# Allegro board H6_REF_DDR4_V1_0.brd
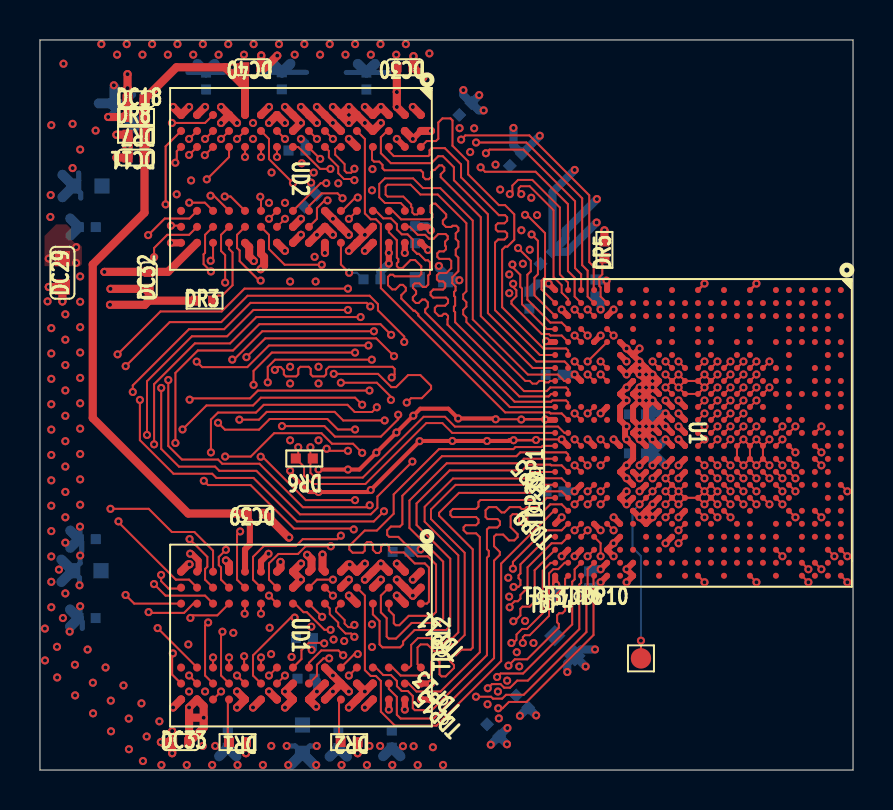
[diagram p0: board, top side]
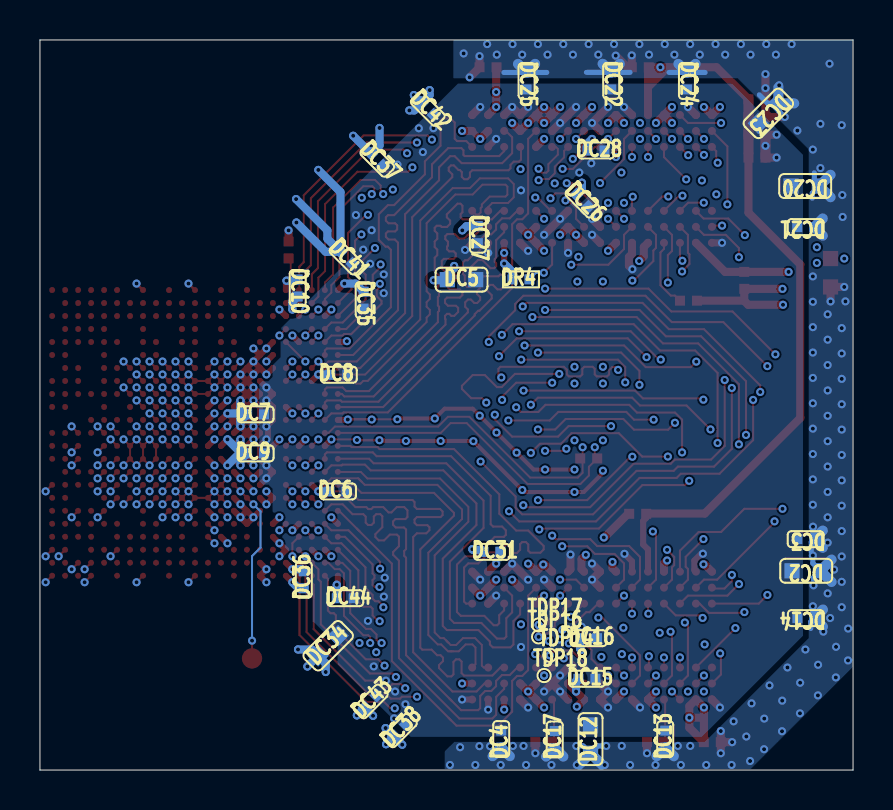
[diagram p1: board, bottom side, seen from below]

Outline 40.7 x 36.55 mm; copper layers: TOP, GND, POWER, BOTTOM. Coordinates in mm from the lower left corner of the outline.
Outline path: 0,36.55 0,0 40.7,0 40.7,36.55 0,36.55

## Design rules (mm)
net group POWER: nets SVREF VDD18-DRAM
net group DDR-ADD: nets SACT SALERT SBG0 SPAR SRST
net group DQS0-DQ0-200MIL: nets SDQ0 SDQ2 SDQ3 SDQ4 SDQ5 SDQ6 SDQ7
net group DQS1-DQ1-200MIL: nets SDQ8 SDQ9 SDQ10 SDQ11 SDQ12 SDQ14 SDQ15
net group DQS2-DQ2-200MIL: nets SDQ16 SDQ17 SDQ18 SDQ19 SDQ20 SDQ21 SDQ22 SDQ23 SDQM2 SDQS2N SDQS2P
net group DQS3-DQ3-200MIL: nets SDQ24 SDQ25 SDQ26 SDQ27 SDQ28 SDQ29 SDQ30 SDQ31 SDQM3 SDQS3N SDQS3P
net group ZQ: nets STEN1 STEN2 SZQ

## Placement (name value [footprint] x y rotation side)
DC2  NC-10uF  [C0603]  2.34 9.97 0 bottom
DC3  NC-1uF  [C0402]  2.37 11.56 0 bottom
DC4  NC-104  [C0402]  17.61 1.55 90 bottom
DC5  10uF  [C0603]  19.6 24.55 180 bottom
DC6  1uF  [C0402]  25.78 13.94 180 bottom
DC7  1uF  [C0402]  29.9 17.81 180 bottom
DC8  104  [C0402]  25.74 19.79 180 bottom
DC9  104  [C0402]  29.9 15.85 180 bottom
DC10  104  [C0402]  27.8 24.13 270 bottom
DC11  104  [C0402]  4.81 30.66 180 top
DC12  10uF  [C0603]  13.14 1.55 90 bottom
DC13  1uF  [C0402]  9.4 1.55 90 bottom
DC14  1uF  [C0402]  2.36 7.6 0 bottom
DC15  104  [C0402]  13.32 4.57 180 bottom
DC16  104  [C0402]  13.24 6.6 180 bottom
DC17  104  [C0402]  14.93 1.53 90 bottom
DC18  104  [C0402]  4.81 33.58 0 top
DC20  NC-10uF  [C0603]  2.4 29.24 0 bottom
DC21  NC-1uF  [C0402]  2.37 27.18 0 bottom
DC22  NC-104  [C0402]  12.1 34.5 270 bottom
DC23  10uF  [C0603]  4.24 32.87 315 bottom
DC24  1uF  [C0402]  8.31 34.49 270 bottom
DC25  1uF  [C0402]  16.34 34.49 270 bottom
DC26  104  [C0402]  13.55 28.5 225 bottom
DC27  104  [C0402]  18.78 26.8 270 bottom
DC28  104  [C0402]  12.87 31.01 180 bottom
DC29  10uF  [C0603]  1.13 24.89 90 top
DC30  1uF  [C0402]  18.27 35.18 180 top
DC31  1uF  [C0402]  18.07 10.92 180 bottom
DC32  104  [C0402]  5.44 24.51 90 top
DC33  104  [C0402]  7.04 1.4 0 top
DC34  NC/10uF  [C0603]  26.27 6.22 135 bottom
DC35  NC/1uF  [C0402]  24.49 23.52 270 bottom
DC36  104  [C0402]  27.49 9.53 90 bottom
DC37  NC/104  [C0402]  23.82 30.55 225 bottom
DC38  NC/104  [C0402]  22.68 1.99 135 bottom
DC39  104  [C0402]  10.78 12.83 180 top
DC40  104  [C0402]  10.65 35.18 180 top
DC41  NC/104  [C0402]  25.35 25.64 225 bottom
DC42  NC/104  [C0402]  21.29 33.09 225 bottom
DC43  NC/104  [C0402]  24.14 3.43 135 bottom
DC44  NC/104  [C0402]  25.41 8.6 180 bottom
DR1  100K  [R0402]  9.89 1.4 180 top
DR2  240-1%  [R0402]  15.48 1.4 180 top
DR3  100K  [R0402]  8.24 23.5 0 top
DR4  240-1%  [R0402]  16.62 24.56 180 bottom
DR5  240-1%  [R0402]  28.25 26.04 90 top
DR6  100R  [R0402]  13.23 15.6 180 top
DR7  2K-1%  [R0402]  4.81 31.8 180 top
DR8  2K-1%  [R0402]  4.81 32.69 0 top
NOREF  -  []  24.92 0 90 top
NOREF#2  -  []  0 0.49 0 top
TDP1  SDQS0P  [TP3_8X10]  24.78 14.92 90 top
TDP2  SDQ1  [TP4X10]  24.74 13.16 90 top
TDP3  SDQS1P  [TP3_8X10]  25.16 8.7 0 top
TDP4  SDQS1N  [TP3_8X10]  25.48 8.3 0 top
TDP5  SDQS0N  [TP3_8X10]  24.65 14.49 135 top
TDP6  SDQ13  [TP4X10]  26.99 8.7 0 top
TDP9  SDQM0  [TP4X10]  24.77 12.02 135 top
TDP10  SDQM1  [TP4X10]  27.71 8.7 0 top
TDP11  SDQS0P  [TP3_8X10]  20.31 6.43 135 top
TDP12  SDQS0N  [TP3_8X10]  20.11 5.94 90 top
TDP13  SDQ1  [TP4X10]  20.14 3.52 135 top
TDP14  SDQ13  [TP0_40]  15.18 5.75 180 bottom
TDP15  SDQM0  [TP4X10]  20.18 2.55 135 top
TDP16  SDQS1P  [TP0_40]  15.74 6.67 180 bottom
TDP17  SDQS1N  [TP0_40]  15.74 7.26 180 bottom
TDP18  SDQM1  [TP0_40]  15.46 4.73 180 bottom
TP1  CPUFB  [TP_SMD]  30.08 5.59 0 top
U1  H6-BGA-1219  [BGA451P65B1500_1500H118]  32.94 16.88 270 top
UD1  DDR4-FBGA96  [BGA96P80B900_1300H120]  13.06 6.73 270 top
UD2  DDR4-FBGA96  [BGA96P80B900_1300H120]  13.06 29.59 270 top

## Library data of the parts
DC2-DC18 DC20-DC35 DC37-DC44 = CAPACITOR_0
DC36 = CAPACITOR_0: signal model: CAPACITOR_0_C0402_104_104
DR1-DR6 = R
DR7 DR8 = ?_0
TDP1-TDP6 TDP9-TDP18 = TestPoint-on wire
TP1 = T_POINT_R
U1 = H6-BGA-1219
UD1 UD2 = DDR4-FBGA96

## Footprints (pads in the part's own frame, mm; a bottom-side part is the same pattern mirrored in y, then rotated)
BGA96P80B900_1300H120
  round 0.4 smd: A1(-3.2,6) A2(-2.4,6) A3(-1.6,6) A7(1.6,6) A8(2.4,6) A9(3.2,6) B1(-3.2,5.2) B2(-2.4,5.2) B3(-1.6,5.2) B7(1.6,5.2) B8(2.4,5.2) B9(3.2,5.2) C1(-3.2,4.4) C2(-2.4,4.4) C3(-1.6,4.4) C7(1.6,4.4) C8(2.4,4.4) C9(3.2,4.4) D1(-3.2,3.6) D2(-2.4,3.6) D3(-1.6,3.6) D7(1.6,3.6) D8(2.4,3.6) D9(3.2,3.6) E1(-3.2,2.8) E2(-2.4,2.8) E3(-1.6,2.8) E7(1.6,2.8) E8(2.4,2.8) E9(3.2,2.8) F1(-3.2,2) F2(-2.4,2) F3(-1.6,2) F7(1.6,2) F8(2.4,2) F9(3.2,2) G1(-3.2,1.2) G2(-2.4,1.2) G3(-1.6,1.2) G7(1.6,1.2) G8(2.4,1.2) G9(3.2,1.2) H1(-3.2,0.4) H2(-2.4,0.4) H3(-1.6,0.4) H7(1.6,0.4) H8(2.4,0.4) H9(3.2,0.4) J1(-3.2,-0.4) J2(-2.4,-0.4) J3(-1.6,-0.4) J7(1.6,-0.4) J8(2.4,-0.4) J9(3.2,-0.4) K1(-3.2,-1.2) K2(-2.4,-1.2) K3(-1.6,-1.2) K7(1.6,-1.2) K8(2.4,-1.2) K9(3.2,-1.2) L1(-3.2,-2) L2(-2.4,-2) L3(-1.6,-2) L7(1.6,-2) L8(2.4,-2) L9(3.2,-2) M1(-3.2,-2.8) M2(-2.4,-2.8) M3(-1.6,-2.8) M7(1.6,-2.8) M8(2.4,-2.8) M9(3.2,-2.8) N1(-3.2,-3.6) N2(-2.4,-3.6) N3(-1.6,-3.6) N7(1.6,-3.6) N8(2.4,-3.6) N9(3.2,-3.6) P1(-3.2,-4.4) P2(-2.4,-4.4) P3(-1.6,-4.4) P7(1.6,-4.4) P8(2.4,-4.4) P9(3.2,-4.4) R1(-3.2,-5.2) R2(-2.4,-5.2) R3(-1.6,-5.2) R7(1.6,-5.2) R8(2.4,-5.2) R9(3.2,-5.2) T1(-3.2,-6) T2(-2.4,-6) T3(-1.6,-6) T7(1.6,-6) T8(2.4,-6) T9(3.2,-6)
BGA451P65B1500_1500H118
  round 0.3 smd: A1(-7.15,7.15) A3(-5.85,7.15) A5(-4.55,7.15) A6(-3.9,7.15) A8(-2.6,7.15) A9(-1.95,7.15) A10(-1.3,7.15) A12(0,7.15) A13(0.65,7.15) A14(1.3,7.15) A16(2.6,7.15) A17(3.25,7.15) A18(3.9,7.15) A19(4.55,7.15) A20(5.2,7.15) A21(5.85,7.15) A22(6.5,7.15) A23(7.15,7.15) AA1(-7.15,-5.85) AA2(-6.5,-5.85) AA3(-5.85,-5.85) AA4(-5.2,-5.85) AA5(-4.55,-5.85) AA7(-3.25,-5.85) AA8(-2.6,-5.85) AA10(-1.3,-5.85) AA11(-0.65,-5.85) AA13(0.65,-5.85) AA14(1.3,-5.85) AA15(1.95,-5.85) AA16(2.6,-5.85) AA17(3.25,-5.85) AA19(4.55,-5.85) AA20(5.2,-5.85) AA21(5.85,-5.85) AA22(6.5,-5.85) AA23(7.15,-5.85) AB1(-7.15,-6.5) AB2(-6.5,-6.5) AB3(-5.85,-6.5) AB4(-5.2,-6.5) AB5(-4.55,-6.5) AB6(-3.9,-6.5) AB7(-3.25,-6.5) AB8(-2.6,-6.5) AB9(-1.95,-6.5) AB10(-1.3,-6.5) AB11(-0.65,-6.5) AB12(0,-6.5) AB13(0.65,-6.5) AB14(1.3,-6.5) AB15(1.95,-6.5) AB16(2.6,-6.5) AB17(3.25,-6.5) AB18(3.9,-6.5) AB19(4.55,-6.5) AB20(5.2,-6.5) AB21(5.85,-6.5) AB22(6.5,-6.5) AB23(7.15,-6.5) AC1(-7.15,-7.15) AC2(-6.5,-7.15) AC3(-5.85,-7.15) AC4(-5.2,-7.15) AC5(-4.55,-7.15) AC6(-3.9,-7.15) AC7(-3.25,-7.15) AC8(-2.6,-7.15) AC9(-1.95,-7.15) AC10(-1.3,-7.15) AC11(-0.65,-7.15) AC12(0,-7.15) AC13(0.65,-7.15) AC14(1.3,-7.15) AC15(1.95,-7.15) AC16(2.6,-7.15) AC17(3.25,-7.15) AC18(3.9,-7.15) AC19(4.55,-7.15) AC20(5.2,-7.15) AC21(5.85,-7.15) AC22(6.5,-7.15) AC23(7.15,-7.15) B1(-7.15,6.5) B2(-6.5,6.5) B3(-5.85,6.5) B4(-5.2,6.5) B5(-4.55,6.5) B6(-3.9,6.5) B7(-3.25,6.5) B8(-2.6,6.5) B9(-1.95,6.5) B10(-1.3,6.5) B12(0,6.5) B13(0.65,6.5) B14(1.3,6.5) B15(1.95,6.5) B16(2.6,6.5) B17(3.25,6.5) B18(3.9,6.5) B19(4.55,6.5) B20(5.2,6.5) B21(5.85,6.5) B22(6.5,6.5) B23(7.15,6.5) C1(-7.15,5.85) C2(-6.5,5.85) C3(-5.85,5.85) C4(-5.2,5.85) C5(-4.55,5.85) C7(-3.25,5.85) C8(-2.6,5.85) C9(-1.95,5.85) C12(0,5.85) C13(0.65,5.85) C14(1.3,5.85) C15(1.95,5.85) C16(2.6,5.85) C18(3.9,5.85) C19(4.55,5.85) C20(5.2,5.85) C22(6.5,5.85) C23(7.15,5.85) D1(-7.15,5.2) D2(-6.5,5.2) D3(-5.85,5.2) D4(-5.2,5.2) D5(-4.55,5.2) D9(-1.95,5.2) D11(-0.65,5.2) D12(0,5.2) D15(1.95,5.2) D16(2.6,5.2) D18(3.9,5.2) D19(4.55,5.2) D20(5.2,5.2) D21(5.85,5.2) D22(6.5,5.2) D23(7.15,5.2) E1(-7.15,4.55) E2(-6.5,4.55) E3(-5.85,4.55) E4(-5.2,4.55) E5(-4.55,4.55) E6(-3.9,4.55) E7(-3.25,4.55) E8(-2.6,4.55) E9(-1.95,4.55) E10(-1.3,4.55) E11(-0.65,4.55) E12(0,4.55) E13(0.65,4.55) E14(1.3,4.55) E15(1.95,4.55) E16(2.6,4.55) E17(3.25,4.55) E18(3.9,4.55) E19(4.55,4.55) E21(5.85,4.55) E22(6.5,4.55) F1(-7.15,3.9) F2(-6.5,3.9) F3(-5.85,3.9) F5(-4.55,3.9) F7(-3.25,3.9) F8(-2.6,3.9) F9(-1.95,3.9) F11(-0.65,3.9) F12(0,3.9) F13(0.65,3.9) F14(1.3,3.9) F15(1.95,3.9) F16(2.6,3.9) F17(3.25,3.9) F19(4.55,3.9) F20(5.2,3.9) F21(5.85,3.9) F22(6.5,3.9) F23(7.15,3.9) G2(-6.5,3.25) G3(-5.85,3.25) G7(-3.25,3.25) G8(-2.6,3.25) G9(-1.95,3.25) G10(-1.3,3.25) G11(-0.65,3.25) G12(0,3.25) G13(0.65,3.25) G14(1.3,3.25) G15(1.95,3.25) G16(2.6,3.25) G17(3.25,3.25) G20(5.2,3.25) G21(5.85,3.25) G22(6.5,3.25) H1(-7.15,2.6) H2(-6.5,2.6) H3(-5.85,2.6) H4(-5.2,2.6) H5(-4.55,2.6) H6(-3.9,2.6) H7(-3.25,2.6) H8(-2.6,2.6) H9(-1.95,2.6) H10(-1.3,2.6) H11(-0.65,2.6) H12(0,2.6) H13(0.65,2.6) H14(1.3,2.6) H15(1.95,2.6) H16(2.6,2.6) H17(3.25,2.6) H18(3.9,2.6) H19(4.55,2.6) H20(5.2,2.6) H21(5.85,2.6) H22(6.5,2.6) H23(7.15,2.6) J2(-6.5,1.95) J3(-5.85,1.95) J5(-4.55,1.95) J6(-3.9,1.95) J7(-3.25,1.95) J8(-2.6,1.95) J9(-1.95,1.95) J10(-1.3,1.95) J11(-0.65,1.95) J12(0,1.95) J13(0.65,1.95) J14(1.3,1.95) J15(1.95,1.95) J16(2.6,1.95) J17(3.25,1.95) J19(4.55,1.95) J20(5.2,1.95) J21(5.85,1.95) J22(6.5,1.95) K1(-7.15,1.3) K2(-6.5,1.3) K3(-5.85,1.3) K7(-3.25,1.3) K8(-2.6,1.3) K9(-1.95,1.3) K10(-1.3,1.3) K11(-0.65,1.3) K12(0,1.3) K13(0.65,1.3) K14(1.3,1.3) K15(1.95,1.3) K16(2.6,1.3) K17(3.25,1.3) K18(3.9,1.3) K20(5.2,1.3) K21(5.85,1.3) K22(6.5,1.3) K23(7.15,1.3) L2(-6.5,0.65) L3(-5.85,0.65) L4(-5.2,0.65) L5(-4.55,0.65) L6(-3.9,0.65) L7(-3.25,0.65) L8(-2.6,0.65) L9(-1.95,0.65) L10(-1.3,0.65) L11(-0.65,0.65) L12(0,0.65) L13(0.65,0.65) L14(1.3,0.65) L15(1.95,0.65) L16(2.6,0.65) L17(3.25,0.65) L18(3.9,0.65) L19(4.55,0.65) L20(5.2,0.65) L21(5.85,0.65) L22(6.5,0.65) M1(-7.15,0) M2(-6.5,0) M3(-5.85,0) M4(-5.2,0) M5(-4.55,0) M6(-3.9,0) M7(-3.25,0) M8(-2.6,0) M9(-1.95,0) M10(-1.3,0) M11(-0.65,0) M12(0,0) M13(0.65,0) M14(1.3,0) M15(1.95,0) M16(2.6,0) M17(3.25,0) M18(3.9,0) M19(4.55,0) M21(5.85,0) M22(6.5,0) M23(7.15,0) N2(-6.5,-0.65) N3(-5.85,-0.65) N7(-3.25,-0.65) N8(-2.6,-0.65) N9(-1.95,-0.65) N10(-1.3,-0.65) N11(-0.65,-0.65) N12(0,-0.65) N13(0.65,-0.65) N14(1.3,-0.65) N15(1.95,-0.65) N16(2.6,-0.65) N17(3.25,-0.65) N18(3.9,-0.65) N19(4.55,-0.65) N20(5.2,-0.65) N22(6.5,-0.65) N23(7.15,-0.65) P1(-7.15,-1.3) P2(-6.5,-1.3) P3(-5.85,-1.3) P4(-5.2,-1.3) P5(-4.55,-1.3) P6(-3.9,-1.3) P7(-3.25,-1.3) P8(-2.6,-1.3) P9(-1.95,-1.3) P10(-1.3,-1.3) P11(-0.65,-1.3) P12(0,-1.3) P13(0.65,-1.3) P14(1.3,-1.3) P15(1.95,-1.3) P16(2.6,-1.3) P17(3.25,-1.3) P18(3.9,-1.3) P19(4.55,-1.3) P20(5.2,-1.3) P21(5.85,-1.3) P22(6.5,-1.3) R2(-6.5,-1.95) R3(-5.85,-1.95) R5(-4.55,-1.95) R6(-3.9,-1.95) R7(-3.25,-1.95) R8(-2.6,-1.95) R9(-1.95,-1.95) R10(-1.3,-1.95) R11(-0.65,-1.95) R12(0,-1.95) R13(0.65,-1.95) R14(1.3,-1.95) R15(1.95,-1.95) R16(2.6,-1.95) R17(3.25,-1.95) R18(3.9,-1.95) R19(4.55,-1.95) R20(5.2,-1.95) R21(5.85,-1.95) R22(6.5,-1.95) R23(7.15,-1.95) T1(-7.15,-2.6) T2(-6.5,-2.6) T3(-5.85,-2.6) T7(-3.25,-2.6) T8(-2.6,-2.6) T9(-1.95,-2.6) T10(-1.3,-2.6) T11(-0.65,-2.6) T12(0,-2.6) T13(0.65,-2.6) T14(1.3,-2.6) T15(1.95,-2.6) T16(2.6,-2.6) T17(3.25,-2.6) T18(3.9,-2.6) T19(4.55,-2.6) T20(5.2,-2.6) T21(5.85,-2.6) T22(6.5,-2.6) U2(-6.5,-3.25) U3(-5.85,-3.25) U4(-5.2,-3.25) U5(-4.55,-3.25) U6(-3.9,-3.25) U7(-3.25,-3.25) U8(-2.6,-3.25) U9(-1.95,-3.25) U10(-1.3,-3.25) U11(-0.65,-3.25) U12(0,-3.25) U13(0.65,-3.25) U14(1.3,-3.25) U15(1.95,-3.25) U16(2.6,-3.25) U17(3.25,-3.25) U18(3.9,-3.25) U19(4.55,-3.25) U21(5.85,-3.25) U22(6.5,-3.25) U23(7.15,-3.25) V1(-7.15,-3.9) V2(-6.5,-3.9) V3(-5.85,-3.9) V5(-4.55,-3.9) V6(-3.9,-3.9) V7(-3.25,-3.9) V9(-1.95,-3.9) V10(-1.3,-3.9) V11(-0.65,-3.9) V13(0.65,-3.9) V15(1.95,-3.9) V17(3.25,-3.9) V19(4.55,-3.9) V20(5.2,-3.9) V21(5.85,-3.9) V22(6.5,-3.9) V23(7.15,-3.9) W1(-7.15,-4.55) W2(-6.5,-4.55) W3(-5.85,-4.55) W4(-5.2,-4.55) W5(-4.55,-4.55) W7(-3.25,-4.55) W8(-2.6,-4.55) W10(-1.3,-4.55) W11(-0.65,-4.55) W13(0.65,-4.55) W14(1.3,-4.55) W16(2.6,-4.55) W17(3.25,-4.55) W19(4.55,-4.55) W21(5.85,-4.55) W22(6.5,-4.55) W23(7.15,-4.55) Y1(-7.15,-5.2) Y2(-6.5,-5.2) Y3(-5.85,-5.2) Y5(-4.55,-5.2) Y7(-3.25,-5.2) Y8(-2.6,-5.2) Y10(-1.3,-5.2) Y11(-0.65,-5.2) Y13(0.65,-5.2) Y14(1.3,-5.2) Y16(2.6,-5.2) Y17(3.25,-5.2) Y19(4.55,-5.2) Y20(5.2,-5.2) Y21(5.85,-5.2) Y22(6.5,-5.2) Y23(7.15,-5.2)
C0402
  rect 0.5x0.5 smd: 1(-0.425,0) 2(0.425,0)
C0603
  rect 0.76x0.76 smd: 1(-0.71,0) 2(0.71,0)
R0402
  rect 0.5x0.5 smd: 1(-0.425,0) 2(0.425,0)
TP0_40
  round 0.406 smd: 1(0,0)
TP3_8X10
  rect 0.097x0.254 smd: 1(0,0)
TP4X10
  rect 0.102x0.254 smd: 1(0,0)
TP_SMD
  round 1.016 smd: 1(0,0)

## Nets
GND: DC2.1 DC3.1 DC4.1 DC5.1 DC6.1 DC7.1 DC8.1 DC9.1 DC10.1 DC12.1 DC13.1 DC14.1 DC15.1 DC16.1 DC17.1 DC18.1 DC20.1 DC21.1 DC22.1 DC23.1 DC24.1 DC25.1 DC26.1 DC27.1 DC28.1 DC29.1 DC30.1 DC31.1 DC32.1 DC33.1 DC34.1 DC35.1 DC36.1 DC37.1 DC38.1 DC39.1 DC40.1 DC41.1 DC42.1 DC43.1 DC44.1 DR1.1 DR2.1 DR3.1 DR4.1 DR5.2 DR8.1 U1.A16(GND2) U1.A21(GND3) U1.A23(GND4) U1.AA8(GND140) U1.AA16(GND141) U1.AA21(GND142) U1.AB3(GND143) U1.AB13(GND144) U1.AB21(GND145) U1.AC1(GND146) U1.AC5(GND147) U1.AC11(GND148) U1.AC19(GND149) U1.AC23(GND150) U1.C12(GND6) U1.C13(GND7) U1.C14(GND8) U1.C18(GND9) U1.C22(GND10) U1.D23(GND11) U1.E13(GND17) U1.E15(GND18) U1.E16(GND19) U1.E18(GND20) U1.F12(GND21) U1.F13(GND22) U1.F14(GND23) U1.F15(GND24) U1.F16(GND25) U1.F17(GND26) U1.F21(GND27) U1.G7(GND1) U1.G9(GND28) U1.G15(GND29) U1.H1(GND30) U1.H7(GND31) U1.H8(GND32) U1.H9(GND33) U1.H10(GND34) U1.H12(GND35) U1.H15(GND36) U1.H16(GND37) U1.H23(GND38) U1.J7(GND39) U1.J8(GND40) U1.J9(GND41) U1.J10(GND42) U1.J11(GND43) U1.J12(GND44) U1.J15(GND45) U1.J16(GND46) U1.J17(GND47) U1.K7(GND48) U1.K8(GND49) U1.K9(GND50) U1.K10(GND51) U1.K11(GND52) U1.K12(GND53) U1.K13(GND54) U1.K14(GND55) U1.K15(GND56) U1.K16(GND57) U1.K17(GND58) U1.L7(GND59) U1.L9(GND60) U1.L10(GND61) U1.L11(GND62) U1.L12(GND63) U1.L13(GND64) U1.L14(GND65) U1.L15(GND66) U1.L18(GND67) U1.M1(GND68) U1.M7(GND69) U1.M10(GND70) U1.M11(GND71) U1.M12(GND72) U1.M13(GND73) U1.M14(GND74) U1.M15(GND75) U1.M18(GND76) U1.M23(GND77) U1.N7(GND78) U1.N10(GND79) U1.N11(GND80) U1.N12(GND81) U1.N13(GND82) U1.N14(GND83) U1.N15(GND84) U1.N18(GND85) U1.P7(GND86) U1.P10(GND87) U1.P11(GND88) U1.P12(GND89) U1.P13(GND90) U1.P14(GND91) U1.P20(GND92) U1.R8(GND93) U1.R9(GND94) U1.R10(GND95) U1.R11(GND96) U1.R12(GND97) U1.R13(GND98) U1.R14(GND99) U1.R15(GND100) U1.R17(GND101) U1.R18(GND102) U1.T7(GND103) U1.T8(GND104) U1.T9(GND105) U1.T10(GND106) U1.T11(GND107) U1.T12(GND108) U1.T13(GND109) U1.T14(GND110) U1.T15(GND111) U1.T16(GND112) U1.T18(GND113) U1.T19(GND114) U1.U6(GND115) U1.U7(GND116) U1.U9(GND117) U1.U10(GND118) U1.U11(GND119) U1.U12(GND120) U1.U15(GND121) U1.U17(GND122) U1.U18(GND123) U1.U22(GND124) U1.U23(GND125) U1.V5(GND126) U1.V7(GND127) U1.V13(GND128) U1.V17(GND129) U1.V19(GND130) U1.V20(GND131) U1.W1(GND132) U1.W3(GND133) U1.W10(GND134) U1.W21(GND135) U1.W23(GND136) U1.Y5(GND137) U1.Y13(GND138) U1.Y19(GND139) UD1.A2(VSSQ1) UD1.A8(VSSQ2) UD1.B2(VSS1) UD1.C9(VSSQ3) UD1.D2(VSSQ4) UD1.D8(VSSQ5) UD1.E1(VSS2) UD1.E3(VSSQ6) UD1.E8(VSSQ7) UD1.E9(VSS3) UD1.F1(VSSQ8) UD1.G8(VSS4) UD1.H1(VSSQ9) UD1.H9(VSSQ10) UD1.K1(VSS5) UD1.K9(VSS6) UD1.M9(VSS7) UD1.N1(VSS8) UD1.T1(VSS9) UD2.A2(VSSQ1) UD2.A8(VSSQ2) UD2.B2(VSS1) UD2.C9(VSSQ3) UD2.D2(VSSQ4) UD2.D8(VSSQ5) UD2.E1(VSS2) UD2.E3(VSSQ6) UD2.E8(VSSQ7) UD2.E9(VSS3) UD2.F1(VSSQ8) UD2.G8(VSS4) UD2.H1(VSSQ9) UD2.H9(VSSQ10) UD2.K1(VSS5) UD2.K9(VSS6) UD2.M9(VSS7) UD2.N1(VSS8) UD2.T1(VSS9)
VCC25-DRAM: DC29.2 DC30.2 DC31.2 DC32.2 DC33.2 UD1.B1(VPP1) UD1.R9(VPP2) UD2.B1(VPP1) UD2.R9(VPP2)
VCC-DRAM: DC2.2 DC3.2 DC4.2 DC5.2 DC6.2 DC7.2 DC8.2 DC9.2 DC11.2 DC12.2 DC13.2 DC14.2 DC15.2 DC16.2 DC17.2 DC20.2 DC21.2 DC22.2 DC23.2 DC24.2 DC25.2 DC26.2 DC27.2 DC28.2 DC34.2 DC35.2 DC37.2 DC38.2 DC41.2 DC42.2 DC43.2 DC44.2 DR7.2 U1.U8(VCC-DRAM1) U1.U13(VCC-DRAM2) U1.U14(VCC-DRAM3) U1.U16(VCC-DRAM4) U1.V9(VCC-DRAM5) U1.V10(VCC-DRAM6) U1.V11(VCC-DRAM7) U1.V15(VCC-DRAM8) UD1.A1(VDDQ1) UD1.A9(VDDQ2) UD1.B3(VDD1) UD1.B9(VDD2) UD1.C1(VDDQ3) UD1.D1(VDD3) UD1.D9(VDDQ4) UD1.F2(VDDQ5) UD1.F8(VDDQ6) UD1.G1(VDDQ7) UD1.G7(VDD4) UD1.G9(VDDQ8) UD1.J1(VDD5) UD1.J2(VDDQ9) UD1.J8(VDDQ10) UD1.J9(VDD6) UD1.L1(VDD7) UD1.L9(VDD8) UD1.R1(VDD9) UD1.T9(VDD10) UD2.A1(VDDQ1) UD2.A9(VDDQ2) UD2.B3(VDD1) UD2.B9(VDD2) UD2.C1(VDDQ3) UD2.D1(VDD3) UD2.D9(VDDQ4) UD2.F2(VDDQ5) UD2.F8(VDDQ6) UD2.G1(VDDQ7) UD2.G7(VDD4) UD2.G9(VDDQ8) UD2.J1(VDD5) UD2.J2(VDDQ9) UD2.J8(VDDQ10) UD2.J9(VDD6) UD2.L1(VDD7) UD2.L9(VDD8) UD2.R1(VDD9) UD2.T9(VDD10)
VCC-IO: U1.G8(VCC-IO)
VDD18-DRAM: DC36.2 U1.W22(VDD18-DRAM)
VDD-CPU: U1.L16(VDD-CPU1) U1.L17(VDD-CPU2) U1.M16(VDD-CPU3) U1.M17(VDD-CPU4) U1.N16(VDD-CPU5) U1.N17(VDD-CPU6) U1.P15(VDD-CPU7) U1.P16(VDD-CPU8) U1.P17(VDD-CPU9)
VDD-CPUFB: TP1.1(TP) U1.R16(VDD-CPUFB1) U1.T17(VDD-CPUFB2)
VDD-CPUS: U1.K18(VDD-CPUS)
VDD-EFUSE: U1.G11(VDD-EFUSE)
VDD-GPU: U1.L8(VDD-GPU1) U1.M8(VDD-GPU2) U1.M9(VDD-GPU3) U1.N8(VDD-GPU4) U1.N9(VDD-GPU5) U1.P8(VDD-GPU6) U1.P9(VDD-GPU7)
VDD-GPUFB: U1.R7(VDD-GPUFB)
VDD-SYS: U1.G13(VDD-SYS1) U1.G14(VDD-SYS2) U1.H13(VDD-SYS3) U1.H14(VDD-SYS4) U1.J13(VDD-SYS5) U1.J14(VDD-SYS6)
SA0: U1.AA15(SA0) UD1.P3(A0) UD2.P3(A0)
SA1: U1.AA17(SA1) UD1.P7(A1) UD2.P7(A1)
SA2: U1.AA19(SA2) UD1.R3(A2) UD2.R3(A2)
SA3: U1.Y20(SA3) UD1.N7(A3) UD2.N7(A3)
SA4: U1.Y16(SA4) UD1.N3(A4) UD2.N3(A4)
SA5: U1.Y10(SA5) UD1.P8(A5) UD2.P8(A5)
SA6: U1.Y8(SA6) UD1.P2(A6) UD2.P2(A6)
SA7: U1.AA5(SA7) UD1.R8(A7) UD2.R8(A7)
SA8: U1.AA7(SA8) UD1.R2(A8) UD2.R2(A8)
SA9: U1.Y3(SA9) UD1.R7(A9) UD2.R7(A9)
SA10: U1.Y17(SA10) UD1.M3(A10) UD2.M3(A10)
SA11: U1.W17(SA11) UD1.T2(A11) UD2.T2(A11)
SA12: U1.W16(SA12) UD1.M7(A12) UD2.M7(A12)
SA13: U1.W5(SA13) UD1.T8(A13) UD2.T8(A13)
SACT: U1.AA11(SACT) UD1.L3(ACT) UD2.L3(ACT)
SALERT: U1.Y21(SALERT) UD1.P9(ALERT) UD2.P9(ALERT)
SBA0: U1.W7(SBA0) UD1.N2(BA0) UD2.N2(BA0)
SBA1: U1.AA20(SBA1) UD1.N8(BA1) UD2.N8(BA1)
SBG0: U1.W8(SBG0) UD1.M2(BG0) UD2.M2(BG0)
SCAS: U1.W19(SCAS/SA15) UD1.M8(A15/CAS) UD2.M8(A15/CAS)
SCKE0: U1.W14(SCKE0) UD1.K2(CKE0) UD2.K2(CKE0)
SCKN: DR6.1 U1.AB12(SCKN) UD1.K8(CK#) UD2.K8(CK#)
SCKP: DR6.2 U1.AC12(SCKP) UD1.K7(CK) UD2.K7(CK)
SCS0: U1.W13(SCS0) UD1.L7(CS0) UD2.L7(CS0)
SDQ0: U1.AB18(SDQ0) UD1.C8(DQ13)
SDQ1: TDP2.1(TP) TDP13.1(TP) U1.AC17(SDQ1) UD1.D7(DQ15)
SDQ2: U1.AB17(SDQ2) UD1.B8(DQ9)
SDQ3: U1.AC16(SDQ3) UD1.C7(DQ11)
SDQ4: U1.AB15(SDQ4) UD1.D3(DQ14)
SDQ5: U1.AB14(SDQ5) UD1.C3(DQ10)
SDQ6: U1.AC14(SDQ6) UD1.C2(DQ12)
SDQ7: U1.AC13(SDQ7) UD1.A3(DQ8)
SDQ8: U1.AB19(SDQ8) UD1.H2(DQ4)
SDQ9: U1.AC20(SDQ9) UD1.G2(DQ0)
SDQ10: U1.AC21(SDQ10) UD1.J3(DQ6)
SDQ11: U1.AB20(SDQ11) UD1.H3(DQ2)
SDQ12: U1.AB23(SDQ12) UD1.J7(DQ7)
SDQ13: TDP6.1(TP) TDP14.1(TP) U1.AA23(SDQ13) UD1.H7(DQ3)
SDQ14: U1.AA22(SDQ14) UD1.F7(DQ1)
SDQ15: U1.Y22(SDQ15) UD1.H8(DQ5)
SDQ16: U1.AC6(SDQ16) UD2.C3(DQ10)
SDQ17: U1.AB6(SDQ17) UD2.A3(DQ8)
SDQ18: U1.AC7(SDQ18) UD2.D3(DQ14)
SDQ19: U1.AB7(SDQ19) UD2.C2(DQ12)
SDQ20: U1.AC9(SDQ20) UD2.B8(DQ9)
SDQ21: U1.AB9(SDQ21) UD2.C7(DQ11)
SDQ22: U1.AC10(SDQ22) UD2.C8(DQ13)
SDQ23: U1.AB10(SDQ23) UD2.D7(DQ15)
SDQ24: U1.Y1(SDQ24) UD2.H2(DQ4)
SDQ25: U1.Y2(SDQ25) UD2.G2(DQ0)
SDQ26: U1.AA1(SDQ26) UD2.H3(DQ2)
SDQ27: U1.AA2(SDQ27) UD2.J3(DQ6)
SDQ28: U1.AC2(SDQ28) UD2.J7(DQ7)
SDQ29: U1.AC3(SDQ29) UD2.F7(DQ1)
SDQ30: U1.AC4(SDQ30) UD2.H8(DQ5)
SDQ31: U1.AB4(SDQ31) UD2.H7(DQ3)
SDQM0: TDP9.1(TP) TDP15.1(TP) U1.AC18(SDQM0) UD1.E2(DM1)
SDQM1: TDP10.1(TP) TDP18.1(TP) U1.Y23(SDQM1) UD1.E7(DM0)
SDQM2: U1.AB11(SDQM2) UD2.E2(DM1)
SDQM3: U1.AB5(SDQM3) UD2.E7(DM0)
SDQS0N: TDP5.1(TP) TDP12.1(TP) U1.AB16(SDQS0N) UD1.A7(DQS1#)
SDQS0P: TDP1.1(TP) TDP11.1(TP) U1.AC15(SDQS0P) UD1.B7(DQS1)
SDQS1N: TDP4.1(TP) TDP17.1(TP) U1.AB22(SDQS1N) UD1.F3(DQS0#)
SDQS1P: TDP3.1(TP) TDP16.1(TP) U1.AC22(SDQS1P) UD1.G3(DQS0)
SDQS2N: U1.AC8(SDQS2N) UD2.A7(DQS1#)
SDQS2P: U1.AB8(SDQS2P) UD2.B7(DQS1)
SDQS3N: U1.AB2(SDQS3N) UD2.F3(DQS0#)
SDQS3P: U1.AB1(SDQS3P) UD2.G3(DQS0)
SODT0: U1.AA13(SODT0) UD1.K3(ODT0) UD2.K3(ODT0)
SPAR: U1.W4(SPAR) UD1.T3(PAR) UD2.T3(PAR)
SRAS: U1.AA4(SRAS/SA16) UD1.L8(A16/RAS) UD2.L8(A16/RAS)
SRST: U1.AA3(SRST) UD1.P1(RESET) UD2.P1(RESET)
STEN1: DR1.2 UD1.N9(TEN)
STEN2: DR3.2 UD2.N9(TEN)
SVREF: DC10.2 DC11.1 DC18.2 DC39.2 DC40.2 DR7.1 DR8.2 U1.V6(SVREF) UD1.M1(VREFCA) UD2.M1(VREFCA)
SWE: U1.AA14(SWE/SA14) UD1.L2(A14/WE) UD2.L2(A14/WE)
SZQ: DR5.1 U1.W2(SZQ)
N22813879: DR2.2 UD1.F9(ZQ)
N22813932: DR4.2 UD2.F9(ZQ)

Pads without a net: U1 A1 A3 A5 A6 A8 A9 A10 A12 A13 A14 A17 A18 A19 A20 A22 AA10 B1 B2 B3 B4 B5 B6 B7 B8 B9 B10 B12 B13 B14 B15 B16 B17 B18 B19 B20 B21 B22 B23 C1 C2 C3 C4 C5 C7 C8 C9 C15 C16 C19 C20 C23 D1 D2 D3 D4 D5 D9 D11 D12 D15 D16 D18 D19 D20 D21 D22 E1 E2 E3 E4 E5 E6 E7 E8 E9 E10 E11 E12 E14 E17 E19 E21 E22 F1 F2 F3 F5 F7 F8 F9 F11 F19 F20 F22 F23 G2 G3 G10 G12 G16 G17 G20 G21 G22 H2 H3 H4 H5 H6 H11 H17 H18 H19 H20 H21 H22 J2 J3 J5 J6 J19 J20 J21 J22 K1 K2 K3 K20 K21 K22 K23 L2 L3 L4 L5 L6 L19 L20 L21 L22 M2 M3 M4 M5 M6 M19 M21 M22 N2 N3 N19 N20 N22 N23 P1 P2 P3 P4 P5 P6 P18 P19 P21 P22 R2 R3 R5 R6 R19 R20 R21 R22 R23 T1 T2 T3 T20 T21 T22 U2 U3 U4 U5 U19 U21 V1 V2 V3 V21 V22 V23 W11 Y7 Y11 Y14; UD1 T7; UD2 T7

## Via types
v1: diameter 0.406, hole 0.203, TOP to BOTTOM, 690 vias

## Routing (per net, layer and track width the routed paths; a pad name or vN(x,y) marks a point on that pad's centre or on a via; arc(x,y) is an arc through that point)
GND: length 268.2
  TOP w0.102: U1.J16 v1(35.21,13.95) ; U1.F13 v1(37.16,16.55) ; U1.G9 v1(36.51,19.15) ; U1.L10 v1(33.91,18.5) ; U1.F14 v1(37.16,15.25) ; U1.L12 v1(33.91,17.2) ; U1.J7 v1(35.21,20.45) ; U1.J10 v1(35.21,18.5) ; U1.J9 v1(35.21,19.15) ; U1.N7 v1(31.96,20.45) ; U1.A21 v1(40.41,10.7) ; U1.K16 v1(34.56,13.95) ; U1.M14 v1(33.26,15.25) ; U1.C14 v1(39.11,15.25) ; v1(24.83,16.52) 24.95,16.52 24.98,16.55 v1(26.11,16.55) ; U1.F21 36.84,11.03 v1(37.16,10.7) ; U1.F17 v1(37.16,13.3) ; U1.J17 v1(35.21,13.3) ; U1.E15 v1(37.81,14.6) ; U1.H23 v1(35.86,9.4) ; U1.H7 v1(35.86,20.45) ; U1.D23 v1(38.46,9.4) ; v1(22.81,17.56) 24.08,17.56 v1(24.09,17.55) ; U1.H10 v1(35.86,18.5) ; U1.M7 v1(33.26,20.45) ; U1.L9 v1(33.91,19.15) ; U1.E13 v1(37.81,15.9) ; U1.A16 v1(40.41,13.95) ; U1.J8 v1(35.21,19.8) ; U1.K12 v1(34.56,17.2) ; U1.E18 v1(37.81,12.65) ; U1.L7 v1(33.91,20.45) ; U1.M18 v1(33.26,12.65) ; U1.J12 v1(35.21,17.2) ; U1.K8 v1(34.56,19.8) ; U1.G7 v1(36.51,20.45) ; U1.M13 v1(33.26,16.55) ; U1.J11 v1(35.21,17.85) ; U1.H16 v1(35.86,13.95) ; U1.M15 v1(33.26,14.6) ; U1.J15 v1(35.21,14.6) ; U1.C12 v1(39.11,17.2) ; U1.F15 v1(37.16,14.6) ; U1.K15 v1(34.56,14.6) ; U1.M12 v1(33.26,17.2) ; U1.L15 v1(33.91,14.6) ; U1.L14 v1(33.91,15.25) ; U1.H12 v1(35.86,17.2) ; U1.F16 v1(37.16,13.95) ; U1.H8 v1(35.86,19.8) ; U1.K10 v1(34.56,18.5) ; U1.M23 v1(33.26,9.4) ; U1.C13 v1(39.11,15.9) ; U1.F12 v1(37.16,17.2) ; U1.K13 v1(34.56,16.55) ; U1.C18 v1(39.11,12.65) ; U1.L11 v1(33.91,17.85) ; U1.K7 v1(34.56,20.45) ; U1.P7 v1(31.31,20.45) ; U1.K17 v1(34.56,13.3) ; U1.L13 v1(33.91,16.55) ; U1.E16 v1(37.81,13.95) ; U1.H15 v1(35.86,14.6) ; U1.K14 v1(34.56,15.25) ; U1.M11 v1(33.26,17.85) ; U1.H9 v1(35.86,19.15) ; U1.A23 v1(40.41,9.4) ; U1.C22 v1(39.11,10.05) ; U1.L18 v1(33.91,12.65) ; U1.K9 v1(34.56,19.15) ; U1.G15 v1(36.51,14.6) ; U1.M10 v1(33.26,18.5) ; U1.K11 v1(34.56,17.85)
  TOP w0.127: U1.H1 v1(35.86,24.35) ; v1(24.83,16.52) 24.82,16.51 v1(23.71,16.51) ; U1.M1 v1(33.26,24.35) ; v1(24.09,17.55) 24.1,17.56 25.28,17.56 v1(25.29,17.55)
  TOP w0.203: v1(12.52,14.98) 12.52,14.87 13.48,13.92 v1(13.94,13.92) 16.46,13.92 v1(16.56,14.02) v1(19,16.46) 19.01,16.47 v1(20.64,16.47) v1(22.38,16.47) 23.45,16.47 23.49,16.51 v1(23.71,16.51) ; v1(22.81,17.56) 22.77,17.6 v1(20.93,17.6) 20.44,18.09 19.04,18.09 v1(18.69,17.74) v1(17.84,16.9) v1(16.84,15.89) 15.99,15.04 v1(15.42,15.04) v1(13.94,15.04)
  TOP w0.3: v1(30.01,19.15) U1.T9 ; v1(30.01,19.15) U1.U9 v1(30.01,18.5) ; v1(30.01,19.15) U1.T8 ; U1.T9 v1(30.66,19.15) ; U1.T9 v1(30.66,18.5) ; U1.T9 v1(30.01,18.5) ; U1.P14 v1(31.31,15.25) ; U1.N12 v1(31.96,17.2) ; U1.R15 v1(30.66,14.6) ; v1(30.66,17.2) U1.R11 ; v1(30.66,17.2) U1.T12 ; v1(30.66,17.2) U1.T11 ; v1(30.66,17.2) U1.R12 ; U1.R11 v1(31.31,17.85) U1.P11 ; U1.R11 v1(31.31,17.2) U1.P12 ; U1.R17 v1(30.66,13.3) U1.T18 ; U1.W23 v1(28.06,9.4) ; U1.AA8 v1(26.76,19.8) ; U1.N11 v1(31.96,17.85) ; U1.U7 v1(30.01,20.45) ; U1.U7 v1(30.01,19.8) ; U1.U7 v1(29.36,19.8) U1.V7 ; v1(30.01,20.45) U1.T7 ; v1(30.01,20.45) U1.U6 ; U1.R14 v1(30.66,15.25) ; U1.V20 v1(28.71,11.35) U1.W21 v1(28.71,10.7) ; U1.T7 v1(30.66,19.8) ; U1.T7 v1(30.01,19.8) ; U1.N18 v1(31.96,12.65) ; U1.Y5 v1(28.06,21.75) ; U1.R13 v1(30.66,16.55) U1.T12 ; U1.P10 v1(31.31,18.5) ; U1.AA16 v1(26.76,13.95) ; U1.T12 v1(30.01,17.2) ; U1.T12 v1(30.01,16.55) ; U1.AB3 v1(26.11,23.05) ; U1.T16 v1(30.01,13.95) ; v1(30.01,16.55) U1.U12 v1(30.01,17.2) ; v1(30.01,16.55) U1.T13 ; U1.T18 v1(30.01,12.65) ; U1.T18 v1(30.66,12.65) ; U1.P13 v1(31.31,16.55) ; U1.U6 v1(30.01,21.1) ; U1.U6 v1(29.36,21.1) U1.V5 ; v1(29.36,13.95) U1.V17 v1(29.36,13.3) U1.U17 ; v1(30.01,17.2) U1.T11 ; v1(30.01,17.2) U1.U11 U1.U10 v1(30.01,18.5) ; v1(30.01,19.8) U1.T8 ; U1.T10 v1(30.66,18.5) ; U1.T10 v1(30.01,18.5) ; U1.T10 U1.T11 ; v1(30.66,18.5) U1.R10 ; U1.AC19 v1(26.11,12.65) ; U1.V13 v1(28.71,16.55) ; U1.N15 v1(31.96,14.6) ; U1.T8 v1(30.66,19.8) ; U1.T8 v1(30.66,19.15) ; v1(30.66,19.8) U1.R8 v1(30.66,19.15) ; U1.R9 v1(30.66,19.15) ; v1(30.01,12.65) U1.T19 v1(30.66,12.65) ; v1(30.01,12.65) U1.U18 ; U1.AB13 v1(26.11,16.55) ; U1.T15 v1(30.01,14.6) U1.U15 ; v1(26.11,10.7) 26.44,11.03 U1.AB21 ; v1(25.84,9.27) 25.79,9.33 U1.AC23 ; v1(29.36,9.4) U1.U23 29.69,9.73 v1(29.36,10.05) U1.U22 ; v1(25.33,21.47) 25.38,21.43 U1.AC5 ; U1.W10 v1(28.06,17.85) ; v1(30.66,12.65) U1.R18 ; U1.N14 v1(31.96,15.25) ; v1(25.29,17.55) 25.31,17.53 U1.AC11 ; v1(28.36,24.49) 28.39,24.46 U1.W1 ; U1.W3 v1(28.71,23.05) ; U1.Y19 v1(28.06,12) ; U1.T14 v1(30.01,15.25) ; U1.Y13 v1(27.41,16.55) ; U1.V19 v1(28.71,12.65) ; U1.N10 v1(31.96,18.5) ; U1.AA21 v1(26.76,10.7) ; U1.AC1 v1(25.46,24.35) ; U1.N13 v1(31.96,16.55) ; U1.P20 v1(31.31,11.35) ; v1(18.66,31.59) UD2.A2
  TOP w0.305: v1(19.57,4.33) UD1.A8 ; v1(19.56,27.01) 19.38,27.19 UD2.A8 ; UD2.C9 v1(17.46,25.89) v1(17.46,25.35) ; UD1.C9 v1(17.46,3.03)
  TOP w0.4: UD2.D8 v1(16.26,26.79) ; v1(16.26,26.79) UD2.E9 v1(15.46,25.99) ; v1(16.26,26.79) UD2.E8 ; UD2.M9 10.47,26.18 10.47,25.71 v1(10.71,25.48) ; v1(6.66,33.19) UD2.T1 v1(7.46,33.19) ; v1(7.49,10.3) 7.43,10.3 UD1.T1 ; v1(14.66,26.79) UD2.G8 v1(13.86,26.79) UD2.H9 ; UD2.F1 v1(15.46,32.39) UD2.E1 ; UD2.F1 v1(14.66,33.19) ; UD2.F1 v1(15.46,33.19) UD2.E1 ; UD1.A2 v1(18.66,8.73) UD1.B2 v1(17.86,9.53) ; UD2.E1 v1(16.26,32.39) UD2.D2 v1(17.06,32.39) ; v1(15.46,3.13) UD1.E9 v1(16.26,3.93) ; UD1.D8 v1(16.26,3.93) ; v1(16.26,3.93) UD1.E8 ; v1(9.86,3.13) UD1.M9 v1(9.86,3.93) ; v1(16.26,10.33) UD1.E1 v1(15.51,10.29) 15.42,10.29 UD1.F1 ; UD1.N1 9.46,10.33 v1(9.31,10.49) ; v1(9.06,33.19) UD2.N1 ; UD2.N1 v1(9.86,32.39) ; UD2.N1 v1(9.06,32.39) ; UD2.B2 v1(18.66,31.59) ; v1(13.06,33.19) UD2.H1 v1(13.86,32.39) ; v1(13.37,10.77) 13.59,10.56 13.59,10.06 UD1.H1 ; v1(12.26,32.39) UD2.K1 v1(11.46,32.39) ; UD1.E3 v1(15.46,8.73) ; v1(13.83,3.18) 13.47,3.53 UD1.H9 v1(13.86,3.93) UD1.G8 ; UD1.K9 v1(11.46,3.93) ; UD2.A2 v1(19.57,31.99) ; v1(12.04,10.42) 12.04,10.11 UD1.K1 ; UD1.D2 v1(17.06,9.53) ; UD2.K9 v1(12.26,25.99) ; UD2.E3 v1(15.46,31.59)
  TOP w0.406: v1(3.42,32.69) DR8.1 DC18.1 v1(4.38,34.13) v1(4.38,34.83) ; v1(19.19,34.67) 18.7,35.17 DC30.1 v1(18.7,35.73) ; DR5.2 v1(28.25,27.01) ; DC39.1 11.26,12.83 12.45,11.64 v1(12.47,11.64) ; 5.46,23.5 DR3.1 ; 5.46,23.5 5.25,23.29 v1(3.51,23.29) ; 5.46,23.5 5.44,23.51 DC32.1 v1(3.53,24.09) ; DC33.1 v1(6.62,0.84) ; DC33.1 v1(6.05,1.4) ; DC33.1 v1(6.62,1.95) ; DR1.1 v1(10.31,0.84) ; v1(1.13,23.46) DC29.1 v1(0.44,24.18) ; DR2.1 v1(15.9,0.84) ; v1(11.88,35.76) 11.3,35.18 DC40.1 v1(11.08,35.77)
  POWER w0.102: v1(12.47,11.64) 12.47,11.49 12.08,11.09 12.08,10.45 v1(12.04,10.42) ; v1(11.46,28.39) v1(12.26,28.39) 12.71,27.95 12.71,27.36 12.88,27.19 13.47,27.19 v1(13.86,26.79) 13.75,26.67 v1(13.75,25.69) 13.75,24.5 v1(13.8,24.45)
  POWER w0.203: v1(13.37,10.77) 13.37,11.09 13.94,11.65 v1(13.94,13.92) v1(13.94,15.04) v1(13.94,16.51) v1(13.94,19.35) v1(13.94,20.19) 13.94,24.31 v1(13.8,24.45) ; v1(12.47,11.64) 12.52,11.69 v1(12.52,14.98) v1(12.52,16.51) v1(12.52,19.35) v1(12.52,20.19) v1(12.52,24.45) 12.52,25.69 12.26,25.94 v1(12.26,25.99)
  BOTTOM w0.254: 13.34,34.92 DC22.1 11.16,34.92 ; v1(2.01,8.2) 2.01,7.68 DC14.1 2.12,7.43 2.12,7.09 ; v1(2.01,10.74) 2.01,10.35 DC2.1 1.98,9.63 v1(1.98,9.25) ; 4.69,33.8 4.26,33.37 DC23.1 3.74,33.01 v1(3.42,32.69) ; 9.21,34.92 DC24.1 7.41,34.92 ; 2.04,28.63 2.04,28.88 DC20.1 1.94,29.49 1.94,29.9 ; 2.09,10.92 2.09,11.41 DC3.1 2,11.62 v1(2,12.18) ; v1(12.35,1.21) 12.77,1.21 DC12.1 13.51,1.21 v1(13.85,1.21) ; 17.48,34.92 DC25.1 15.33,34.92
  BOTTOM w0.406: v1(25.46,24.35) 24.9,24.35 DC35.1 ; v1(28.36,24.49) 27.86,24.49 DC10.1 ; DC27.1 19.35,27.22 v1(19.56,27.01) ; v1(19.05,11.05) 19.02,11.02 18.6,11.02 DC31.1 ; v1(21.19,34.04) 21.19,33.79 21.59,33.39 ; DC34.1 27.09,6.04 v1(27.78,6.04) ; DC34.1 26.39,5.34 v1(26.39,4.91) ; DC34.1 v1(27.31,5.18) ; DC9.1 30.66,16.18 v1(30.66,16.55) ; DC9.1 30.66,15.52 v1(30.66,15.25) ; DC9.1 30.61,15.85 ; DC44.1 25.84,8.61 v1(25.84,9.27) ; DC38.1 v1(23.4,2.1) ; DC38.1 v1(22.56,1.27) ; DC38.1 v1(23.37,1.29) ; v1(24.02,2.71) DC43.1 v1(24.83,2.74) ; v1(26.76,30.04) 25.65,28.93 DC41.1 ; DC26.1 13.57,29.07 v1(13.57,29.4) ; DC41.1 26.31,26.6 26.31,27.01 v1(27.88,28.58) ; DC41.1 26.4,25.94 v1(27.86,27.41) ; v1(20.99,24.52) 20.33,24.52 DC5.1 20.31,24.79 19.97,25.13 v1(19.97,25.23) ; DC15.1 13.86,4.45 v1(13.86,3.93) ; DC6.1 26.21,13.95 v1(26.76,13.95) ; DC36.1 27.76,9.1 v1(28.06,9.4) ; 21.59,33.39 v1(21.98,33.79) ; 21.59,33.39 21.96,33.02 v1(22.21,33.02) ; v1(26.76,19.8) 26.18,19.8 DC8.1 ; DR4.1 17.04,24.93 v1(17.46,25.35) ; v1(31.31,17.85) 30.37,17.85 ; 30.37,17.85 30.66,18.14 v1(30.66,18.5) ; 30.37,17.85 DC7.1 30.66,17.47 v1(30.66,17.2) ; v1(13.6,6.01) 13.67,6.07 DC16.1 ; v1(23.7,32.14) 23.7,31.26 DC37.1 v1(25.02,31.75) ; v1(31.31,15.25) 30.71,15.85 30.61,15.85 ; 30.61,15.85 v1(31.31,16.55) ; DC28.1 13.29,31.36 v1(13.06,31.59)
  BOTTOM w0.508: 1.51,8.03 DC14.1 1.51,7.18 ; 12.53,35.35 DC22.1 11.67,35.35 ; 1.52,11.13 DC3.1 1.52,11.99 ; 8.74,35.35 DC24.1 7.88,35.35 ; 1.08,10.53 DC2.1 1.08,9.42 ; 1.52,26.75 DC21.1 1.52,27.61 ; 14.5,0.68 DC17.1 15.36,0.68 ; 15.91,35.35 DC25.1 16.77,35.35 ; 13.7,0.28 DC12.1 12.58,0.28 ; 1.13,28.68 DC20.1 1.13,29.79 ; 17.18,0.7 DC4.1 18.04,0.7 ; 8.97,0.69 DC13.1 9.83,0.69 ; 3.74,34.16 DC23.1 2.95,33.37
  vias: v1(0.25,7.08) v1(0.25,5.49) v1(0.38,23.46) v1(0.57,32.28) v1(0.54,28.78) v1(0.52,27.69) v1(0.57,22.12) v1(0.57,20.85) v1(0.57,19.58) v1(0.57,18.31) v1(0.57,17.04) v1(0.57,15.77) v1(0.57,14.5) v1(0.57,13.23) v1(0.57,11.96) v1(0.57,10.69) v1(0.57,9.42) v1(0.57,8.15) v1(0.85,6.17) v1(0.86,4.63) v1(0.95,10.03) v1(1.18,35.36) v1(1.15,7.61) v1(1.27,22.81) v1(1.27,21.54) v1(1.27,20.27) v1(1.27,19) v1(1.27,17.73) v1(1.27,16.46) v1(1.27,15.19) v1(1.27,13.92) v1(1.27,12.65) v1(1.27,11.38) v1(1.27,8.84) v1(1.49,6.93) v1(1.63,32.35) v1(1.63,30.13) v1(1.75,5.27) v1(1.76,3.74) v1(2.01,31.06) v1(2.01,24.71) v1(2.01,23.44) v1(2.01,22.17) v1(2.01,20.9) v1(2.01,19.63) v1(2.01,18.36) v1(2.01,17.09) v1(2.01,15.82) v1(2.01,14.55) v1(2.01,13.28) v1(2.39,6.03) v1(2.65,4.37) v1(2.66,2.84) v1(2.79,32.01) v1(3.07,36.34) v1(3.28,5.13) v1(3.55,3.47) v1(3.56,1.94) v1(3.7,34.28) v1(3.86,35.81) v1(4.18,4.24) v1(4.34,36.34) v1(4.44,2.58) v1(4.45,1.04) v1(5.08,3.34) v1(5.13,35.81) v1(5.15,0.45) v1(5.34,1.68) v1(5.61,36.34) v1(5.98,2.44) v1(6.08,0.25) v1(6.4,35.81) v1(6.88,36.34) v1(6.84,28.82) v1(7.35,0.25) v1(7.43,6.29) v1(7.46,3.93) v1(7.56,29.51) v1(7.67,35.81) v1(8.15,36.34) v1(8.15,1.21) v1(8.26,3.93) v1(8.62,0.25) v1(8.77,1.21) v1(8.94,35.81) v1(9.42,36.34) v1(9.68,6.87) v1(9.89,0.25) v1(10.21,35.81) v1(10.69,36.34) v1(10.66,32.39) v1(10.66,31.59) v1(11.16,0.25) v1(11.5,7.12) v1(11.59,29.91) v1(11.57,5.8) v1(11.58,1.21) v1(11.96,36.34) v1(12.43,0.25) v1(12.59,5.66) v1(12.75,35.81) v1(13.23,36.34) v1(13.83,0.25) v1(14.02,35.81) v1(14.5,36.34) v1(14.93,29.37) v1(15.1,0.25) v1(15.29,35.81) v1(15.23,6.46) v1(15.77,36.34) v1(16.37,0.25) v1(16.49,1.21) v1(16.56,35.81) v1(16.64,30.08) v1(16.62,7.29) v1(17.04,36.34) v1(17.03,1.21) v1(17.64,0.25) v1(17.83,35.81) v1(18.17,1.19) v1(18.31,36.34) v1(18.7,1.19) v1(18.91,0.25) v1(19.49,35.87) v1(19.67,1.14) v1(20.18,0.25) v1(23.03,29.06) v1(23.87,5.9) v1(24.59,28.65) v1(24.7,6.36)
VCC25-DRAM: length 77.9
  TOP w0.4: v1(7.46,3.13) UD1.R9 8.19,3.2 v1(8.19,2.62) ; UD1.B1 v1(17.86,10.33) ; UD2.R9 6.41,24.94 ; UD2.B1 v1(17.86,33.19)
  TOP w0.406: 7.46,2.62 7.47,2.62 v1(8.19,2.62) 8.19,2.12 DC33.2 7.46,1.4 7.46,2.62 ; 7.46,2.62 v1(7.46,3.13) ; v1(3.23,24.94) DC32.2 6.41,24.94 ; v1(17.86,33.19) v1(17.86,33.94) 17.86,35.16 DC30.2
  POWER w0.305: v1(17.86,10.33) 17.27,10.92 14.93,10.92 13.84,9.84 13.84,8.27 13.22,7.65 13.22,7.46 13.1,7.34 13.1,3.09 12.56,2.54 8.27,2.54 v1(8.19,2.62)
  POWER w0.406: 17.27,33.78 17.71,33.78 v1(17.86,33.94) v1(17.86,33.19)
  POWER w0.508: v1(7.46,3.13) 2.95,7.65 2.95,26.16 3.23,26.44 3.23,29.26 4.94,30.98 4.94,32.26 6.46,33.78 17.27,33.78 v1(17.86,33.19)
  vias: v1(0.44,25.6) v1(1.81,26.17) v1(1.81,25.38)
VCC-DRAM: length 40.5
  TOP w0.3: U1.U16 v1(29.36,14.6) U1.V15 v1(29.36,15.25) U1.U14 U1.U13 v1(29.36,16.55) 29.28,16.63 29.28,17.12 v1(29.36,17.2) U1.V11 U1.V10 v1(29.36,18.5) U1.V9 v1(29.36,19.15) U1.U8
  TOP w0.305: UD2.B3 v1(17.86,31.59) ; UD2.A9 v1(19.42,26.03) ; UD1.L1 11.06,10.45 v1(11.44,10.82) ; UD2.B9 v1(18.26,25.89) ; UD1.R1 7.94,10.01 7.94,10.49 7.6,10.83 v1(7.52,10.83) ; UD1.B9 v1(18.26,3.03) ; UD1.A9 v1(19.57,3.53)
  TOP w0.356: UD2.T9 v1(6.56,26.39)
  TOP w0.4: UD2.L1 v1(11.46,33.19) ; UD2.J8 v1(13.06,27.59) ; UD1.F2 v1(15.46,9.53) ; UD1.C1 v1(17.06,10.33) UD1.D1 v1(16.26,9.53) ; UD2.G9 v1(14.26,25.89) ; UD2.G7 v1(14.66,27.59) UD2.F8 v1(15.46,26.79) ; UD1.A1 v1(18.66,9.53) ; UD2.L9 11.06,25.84 11.22,25.68 11.22,25.24 v1(11.05,25.07) ; UD1.J2 v1(13.06,9.53) UD1.J1 v1(13.07,10.34) ; v1(14.14,10.79) 14.14,10.05 UD1.G1 ; UD2.J2 v1(13.06,32.39) UD2.J1 v1(12.26,33.19) ; UD2.R1 v1(8.26,33.19) ; v1(16.26,33.19) UD2.D1 v1(17.06,33.19) UD2.C1 ; v1(13.86,33.19) UD2.G1 v1(14.66,32.39) UD2.F2 ; UD1.F8 v1(14.66,3.93) UD1.G9 ; UD1.F8 v1(14.66,4.73) UD1.G7 ; UD1.F8 v1(15.46,3.93) ; UD1.L9 v1(10.66,3.13) ; UD2.D9 v1(16.26,25.99) ; UD1.B3 v1(17.86,8.73) ; UD1.D9 v1(16.26,3.13) ; UD2.J9 v1(13.06,26.79) ; v1(12.26,3.13) UD1.J9 v1(12.26,3.93) UD1.J8 ; UD2.A1 v1(18.66,33.19) ; UD1.T9 v1(6.66,3.13)
  TOP w0.406: DR7.2 v1(3.83,31.8) ; DC11.2 v1(3.83,30.66)
  TOP w0.508: DC11.2 v1(4.38,31.25) DR7.2
  POWER w0.178: v1(18.66,9.53) 18.27,9.92 17.47,9.92 v1(17.06,10.33)
  vias: v1(13.1,30.37) v1(13.58,7.17) v1(13.7,29.91) v1(14.7,6.53) v1(16.62,29.02) v1(16.62,6.16) v1(21,32.13) v1(21.53,30.93) v1(21.73,32.12) v1(22.4,3.29) v1(22.8,30.3) v1(22.92,3.93) v1(22.97,2.59) v1(23.38,4.48) v1(23.49,24.81) v1(23.49,23.87) v1(23.44,9.63) v1(23.48,8.68) v1(23.99,5.19) v1(24.1,27.02) v1(24.17,25.34) v1(24.28,7.47) v1(24.51,26.05) v1(24.88,27.78)
VDD18-DRAM: length 1.1
  TOP w0.3: U1.W22 v1(28.06,10.05)
  BOTTOM w0.406: DC36.2 27.59,10.05 v1(28.06,10.05)
VDD-CPU: length 9.8
  TOP w0.102: U1.N17 v1(31.96,13.3) U1.P17 ; U1.N17 v1(31.96,13.95) ; U1.N17 U1.M17 ; U1.L17 v1(33.26,13.3) U1.M17 ; U1.L17 v1(33.91,13.3) ; U1.L17 v1(33.26,13.95) ; U1.L17 v1(33.91,13.95) U1.L16 33.59,14.28 v1(33.26,13.95) ; U1.N16 v1(31.96,13.95) ; v1(31.96,13.95) U1.P17 ; v1(31.96,13.95) U1.P16 ; U1.P16 v1(31.31,14.6) U1.P15 ; U1.P16 v1(31.31,13.95) U1.P17 ; U1.P17 v1(31.31,13.3) ; v1(33.26,13.95) U1.M16 ; v1(33.26,13.95) U1.M17
VDD-CPUFB: length 9.4
  TOP w0.102: TP1.1 v1(30.08,6.48) ; U1.R16 v1(30.66,13.95) U1.T17 v1(30.01,13.3)
  BOTTOM w0.102: v1(30.08,6.48) 30.08,10.71 29.66,11.13 29.66,12.95 v1(30.01,13.3)
VDD-CPUS: length 0.5
  TOP w0.102: U1.K18 v1(34.56,12.65)
VDD-GPU: length 7.7
  TOP w0.102: v1(33.26,19.15) U1.M9 U1.N9 v1(31.96,19.15) ; v1(33.26,19.15) U1.M8 ; v1(33.26,19.15) U1.L8 ; U1.P9 v1(31.31,19.15) U1.P8 ; U1.N8 U1.M8 ; U1.N8 v1(31.96,19.15) ; U1.N8 v1(31.96,19.8) U1.P8 ; U1.M8 v1(33.26,19.8) 33.59,19.48 U1.L8 ; U1.P8 v1(31.31,19.8) ; U1.P8 v1(31.96,19.15) ; U1.L8 v1(33.91,19.8)
VDD-GPUFB: length 0.5
  TOP w0.102: U1.R7 v1(30.66,20.45)
VDD-SYS: length 6.5
  TOP w0.102: U1.H14 35.54,15.58 v1(35.21,15.25) U1.J14 U1.J13 v1(35.21,16.55) U1.H13 ; U1.H14 v1(35.86,15.25) 36.19,15.58 U1.G14 ; U1.H14 U1.H13 ; U1.G14 v1(36.51,15.25) ; U1.G14 U1.G13 ; U1.H13 v1(35.86,16.55) U1.G13 ; U1.G13 v1(36.51,16.55)
Net_7: length 0.5
  TOP w0.102: 32.29,11.68 v1(31.96,11.35)
Net_15: length 0.5
  TOP w0.102: 32.29,12.33 v1(31.96,12)
Net_30: length 0.5
  TOP w0.102: 37.49,16.88 v1(37.81,17.2)
Net_44: length 0.5
  TOP w0.102: 36.19,13.63 v1(36.51,13.3)
Net_66: length 0.5
  TOP w0.102: 31.64,12.98 v1(31.31,12.65)
Net_120: length 0.5
  TOP w0.102: 38.14,10.38 v1(38.46,10.05)
Net_121: length 0.5
  TOP w0.102: 39.44,11.03 39.44,11.03 v1(39.76,10.7)
Net_132: length 0.5
  TOP w0.102: 37.49,15.58 v1(37.81,15.25)
Net_140: length 0.5
  TOP w0.102: 35.54,13.63 v1(35.86,13.3)
SA0: length 53.7
  TOP w0.102: UD1.P3 8.26,8.73 6.29,8.73 v1(5.71,9.31) ; v1(6.07,19.13) 6.07,16.08 6.96,15.19 8.77,15.19 8.98,14.98 10.84,14.98 13.01,12.8 16.56,12.8 16.89,13.13 16.89,13.69 v1(18.64,15.44) ; UD2.P3 v1(8.25,30.78) ; U1.AA15 v1(26.76,15.25)
  POWER w0.102: v1(8.25,30.78) 5.84,28.37 5.84,26.04 6.07,25.82 v1(6.07,19.13) 6.07,16.16 5.71,15.8 v1(5.71,9.31) ; v1(26.76,15.25) 26.57,15.44 v1(18.64,15.44)
SA1: length 50.2
  TOP w0.102: v1(7.47,28.4) 8.25,28.4 UD2.P7 ; v1(7.14,17.05) 8.33,18.25 10.67,18.25 11.06,18.64 15.77,18.64 v1(16.13,18.28) ; UD1.P7 v1(8.66,5.64) ; U1.AA17 v1(26.76,13.3)
  POWER w0.102: v1(8.66,5.64) 7.17,7.13 7.17,9.19 6.77,9.59 6.77,13.73 7.14,14.09 v1(7.14,17.05) 7.14,25.59 7.47,25.92 v1(7.47,28.4) ; v1(26.76,13.3) 26.46,13.3 25.74,14.02 17.68,14.02 17.19,14.51 17.19,16.04 16.54,16.69 16.54,17.47 16.13,17.89 v1(16.13,18.28)
SA2: length 54.2
  TOP w0.102: v1(17.22,12.95) 16.71,12.44 12.87,12.44 10.69,14.62 8.83,14.62 8.62,14.83 6.68,14.83 5,16.51 v1(5,18.53) ; U1.AA19 v1(26.76,12) ; UD1.R3 7.68,8.33 7.21,7.87 5.48,7.87 v1(5.44,7.91) ; UD2.R3 v1(7.46,30.79)
  POWER w0.102: v1(17.22,12.95) 24.8,12.95 25.82,11.94 26.7,11.94 v1(26.76,12) ; v1(7.46,30.79) 7.46,30.54 5,28.08 v1(5,18.53) 4.64,18.17 4.64,8.7 v1(5.44,7.91)
SA3: length 51.9
  TOP w0.102: v1(8.91,17.38) 9.26,17.04 10.96,17.04 11.5,17.57 14.38,17.57 14.91,17.05 v1(15.77,17.05) ; UD1.N7 v1(9.46,5.64) ; v1(28.06,10.7) 28.06,11.35 U1.Y20 ; UD2.N7 8.7,28.75 v1(8.54,28.75)
  POWER w0.102: v1(8.54,28.75) 8.54,26 8.91,25.63 v1(8.91,17.38) 8.91,13.36 8.6,13.04 8.6,7.84 8.77,7.66 8.77,6.78 9.46,6.09 v1(9.46,5.64) ; v1(15.77,17.05) 15.77,14.9 15.42,14.54 15.42,12.84 16.37,11.89 24.36,11.89 25.19,11.06 27.71,11.06 v1(28.06,10.7)
SA4: length 51.5
  TOP w0.102: UD2.N3 9.46,30.68 v1(8.35,29.57) ; v1(7.49,18.54) 7.56,18.6 10.52,18.6 10.91,18.99 v1(16.49,18.99) ; v1(7.53,7.61) 7.66,7.74 8.87,7.74 UD1.N3 ; U1.Y16 v1(27.41,13.95)
  POWER w0.102: v1(7.53,7.61) 7.53,7.62 7.53,9.57 7.13,9.97 7.13,13.59 7.49,13.95 v1(7.49,18.54) 7.49,25.44 7.83,25.78 7.83,29.04 v1(8.35,29.57) ; v1(16.49,18.99) 16.49,18.98 16.5,18.97 16.5,18.02 16.9,17.62 16.9,16.84 17.55,16.18 17.55,14.66 17.83,14.38 26.04,14.38 26.11,14.31 27.06,14.31 v1(27.41,13.95)
SA5: length 48.1
  TOP w0.102: v1(16.86,18.16) 16.62,17.92 15.75,17.92 15.39,18.28 11.2,18.28 10.81,17.89 8.91,17.89 8.56,17.54 v1(8.56,15.9) ; UD1.P8 8.26,4.73 8.26,7.23 v1(8.42,7.39) ; U1.Y10 v1(27.41,17.85) ; v1(8.56,24.96) 8.19,25.33 8.19,25.82 8.26,25.89 8.26,26.79 UD2.P8
  POWER w0.102: v1(27.41,17.85) 27.06,17.5 25.91,17.5 25.14,18.27 21.35,18.27 19.61,20.01 16.96,20.01 16.86,19.9 16.86,18.16 v1(16.86,18.16) ; v1(8.56,24.96) v1(8.56,15.9) 8.56,13.5 8.24,13.19 8.24,7.56 v1(8.42,7.39)
SA6: length 46.1
  TOP w0.102: v1(16.44,21.25) 11.46,21.25 10.38,20.17 8.12,20.17 v1(7.85,20.44) ; UD2.P2 v1(8.26,31.59) ; UD1.P2 8.26,9.53 8.26,10.06 8.38,10.18 8.38,10.67 v1(7.49,11.56) ; U1.Y8 v1(27.41,19.8)
  POWER w0.102: v1(27.41,19.8) 27.41,19.65 26.88,19.12 25.8,19.12 25.58,19.34 21.79,19.34 20.05,21.07 16.62,21.07 v1(16.44,21.25) ; v1(8.26,31.59) 8.71,31.15 8.71,29.42 8.18,28.9 8.18,25.63 7.85,25.29 v1(7.85,20.44) 7.85,13.8 7.49,13.44 v1(7.49,11.56)
SA7: length 52.1
  TOP w0.102: U1.AA5 v1(26.76,21.75) ; v1(5.71,16.31) 5.71,19.32 7.75,21.36 9.51,21.36 10.83,22.67 v1(16.05,22.67) ; UD1.R8 v1(7.46,4.73) ; v1(5.71,25.67) 5.71,26.13 6.37,26.79 7.46,26.79 UD2.R8
  POWER w0.102: v1(16.05,22.67) 16.22,22.85 20.79,22.85 21.66,21.98 26.53,21.98 v1(26.76,21.75) ; v1(7.46,4.73) 7.26,4.73 6.24,5.74 6.24,8.11 5.35,9 5.35,15.94 v1(5.71,16.31) v1(5.71,25.67)
SA8: length 52.9
  TOP w0.102: v1(4.29,20.22) 6.5,22.42 9.07,22.42 10.39,23.74 16.5,23.74 16.92,23.33 16.92,23.01 18.23,21.7 v1(18.23,21.43) ; UD2.R2 v1(7.46,31.59) ; U1.AA7 v1(26.76,20.45) ; v1(3.93,12.45) 3.93,12.4 6.8,9.53 7.46,9.53 UD1.R2
  POWER w0.102: v1(7.46,31.59) 4.29,28.42 v1(4.29,20.22) 3.93,19.86 v1(3.93,12.45) ; v1(26.76,20.45) 26.07,20.45 25.67,20.05 21.58,20.05 20.2,21.43 v1(18.23,21.43)
SA9: length 53.4
  TOP w0.102: v1(5.36,16.77) 5.36,19.46 7.61,21.71 9.37,21.71 10.69,23.03 v1(15.42,23.03) ; v1(5.42,26.78) 6.25,27.61 7.48,27.61 UD2.R7 ; UD1.R7 v1(5.89,7.11) ; U1.Y3 v1(27.41,23.05)
  POWER w0.102: v1(15.42,23.03) 15.95,23.56 21.08,23.56 21.95,22.7 27.06,22.7 v1(27.41,23.05) ; v1(5.42,26.78) 5.36,26.72 v1(5.36,16.77) 5,16.41 5,8.85 5.89,7.96 v1(5.89,7.11)
SA10: length 49.6
  TOP w0.102: v1(10.69,19.28) 10.69,19.98 11.61,20.9 v1(15.77,20.9) ; v1(10.25,7.83) 10.26,7.84 UD1.M3 ; UD2.M3 v1(10.26,30.69) ; U1.Y17 v1(27.41,13.3)
  POWER w0.102: v1(27.41,13.3) 27.06,12.95 26.31,12.95 25.59,13.67 17.54,13.67 16.48,14.72 16.48,16.06 16.13,16.42 16.13,17.38 15.77,17.74 v1(15.77,20.9) ; v1(10.25,7.83) 10.02,8.05 10.02,11.44 10.69,12.11 v1(10.69,19.28) 10.69,24.99 10.35,25.33 10.35,26.2 9.96,26.6 9.96,30.38 v1(10.26,30.69)
SA11: length 52.4
  TOP w0.102: v1(6.42,19.52) 6.42,16.22 7.1,15.54 8.91,15.54 9.13,15.33 10.98,15.33 13.16,13.16 16.4,13.16 v1(16.5,13.26) ; UD2.T2 6.29,31.22 v1(6.29,28.31) ; v1(6.06,9.77) 6.06,9.46 6.43,9.09 7.02,9.09 UD1.T2 ; U1.W17 v1(28.06,13.3)
  POWER w0.102: v1(6.06,9.77) 6.06,14.03 6.42,14.39 6.42,14.58 6.26,14.74 6.26,14.89 6.42,15.05 6.42,15.26 6.3,15.38 6.2,15.38 6.08,15.5 6.08,15.67 6.2,15.79 6.3,15.79 6.42,15.91 v1(6.42,19.52) 6.42,25.97 6.2,26.19 6.2,28.22 v1(6.29,28.31) ; v1(16.5,13.26) 16.56,13.31 24.95,13.31 25.96,12.3 26.43,12.3 26.69,12.55 27.31,12.55 v1(28.06,13.3)
SA12: length 47.1
  TOP w0.102: v1(10.22,5.7) 10.22,5.18 UD1.M7 ; v1(9.98,17.54) 10.96,17.54 11.35,17.93 14.75,17.93 15.18,17.5 v1(17.25,17.5) ; v1(9.25,28.71) 9.55,28.71 UD2.M7 ; U1.W16 v1(28.06,13.95)
  POWER w0.102: v1(9.25,28.71) 9.25,26.3 9.64,25.91 9.64,25.04 9.98,24.7 v1(9.98,17.54) 9.98,12.91 9.66,12.6 9.66,7.83 10.22,7.27 v1(10.22,5.7) ; v1(28.06,13.95) 27.41,14.6 26.37,14.6 26.24,14.73 18.09,14.73 17.9,14.92 17.9,16.33 17.25,16.98 v1(17.25,17.5)
SA13: length 52
  TOP w0.102: UD2.T8 7,27.25 v1(6.56,27.25) ; v1(6.78,16.37) 6.78,19.88 7.9,21 9.66,21 10.98,22.32 17.04,22.32 v1(17.58,21.78) ; UD1.T8 6.61,4.78 6.61,5.8 v1(6.65,5.84) ; U1.W5 v1(27.41,20.45)
  POWER w0.102: v1(17.58,21.78) 20.35,21.78 21.73,20.4 25.63,20.4 26.03,20.81 27.06,20.81 v1(27.41,20.45) ; v1(6.56,27.25) 7.11,26.69 7.11,26.07 6.78,25.74 v1(6.78,16.37) 6.78,14.24 6.42,13.88 6.42,9.44 6.82,9.05 6.82,6 v1(6.65,5.84)
SACT: length 42.9
  TOP w0.102: UD2.L3 v1(11.06,30.69) ; v1(16.61,20.54) 11.77,20.54 11.4,20.18 v1(11.4,19.41) ; UD1.L3 v1(11.06,7.83) ; U1.AA11 v1(26.76,17.85)
  POWER w0.102: v1(26.76,17.85) 26.06,17.85 25.28,18.63 21.49,18.63 19.76,20.36 16.79,20.36 v1(16.61,20.54) ; v1(11.06,30.69) 11.06,30.48 10.31,29.73 10.31,26.74 11.05,26.01 11.05,25.58 11.4,25.22 v1(11.4,19.41) 11.4,11.79 10.73,11.12 10.73,8.63 11.06,8.3 v1(11.06,7.83)
SALERT: length 45.4
  TOP w0.102: v1(27.41,10.7) 27.74,11.03 U1.Y21 ; UD1.P9 v1(9.06,3.93) ; UD2.P9 8.66,25.61 v1(8.54,25.49) ; v1(8.2,14.48) 8.41,14.27 10.54,14.27 12.72,12.09 15.66,12.09 v1(15.71,12.04)
  POWER w0.102: v1(27.41,10.7) 27.26,10.7 26.91,10.35 25.4,10.35 24.21,11.53 16.22,11.53 v1(15.71,12.04) ; v1(9.06,3.93) 9.06,5.88 7.88,7.06 7.88,13.33 8.2,13.65 v1(8.2,14.48) 8.2,25.15 8.55,25.49 v1(8.54,25.49)
SBA0: length 44.6
  TOP w0.102: v1(9.62,20.55) 9.71,20.55 11.13,21.96 v1(16.72,21.96) ; UD2.N2 v1(9.06,31.59) ; UD1.N2 9.06,9.53 9.06,10.14 8.95,10.26 8.95,10.67 v1(9.31,11.02) ; U1.W7 v1(28.06,20.45)
  POWER w0.102: v1(16.72,21.96) 16.72,21.96 16.89,22.14 20.5,22.14 21.88,20.76 25.54,20.76 25.89,21.1 27.41,21.1 v1(28.06,20.45) ; v1(9.31,11.02) 9.31,12.74 9.62,13.06 v1(9.62,20.55) 9.62,24.55 9.28,24.89 9.28,25.76 8.89,26.15 8.89,29.11 9.21,29.42 9.21,31.45 v1(9.06,31.59)
SBA1: length 46.5
  TOP w0.102: v1(9.27,15.69) 10.55,15.69 11.72,16.86 14.09,16.86 14.62,16.33 15.67,16.33 v1(16.13,15.88) ; UD1.N8 9.06,4.73 9.06,6.86 v1(9.13,6.92) ; U1.AA20 v1(27.41,12) ; UD2.N8 9.06,26.79 9.06,25.98 9.27,25.78 v1(9.27,24.4)
  POWER w0.102: v1(9.27,24.4) v1(9.27,15.69) 9.27,13.21 8.95,12.89 8.95,8.06 9.13,7.89 9.13,6.93 v1(9.13,6.92) ; v1(16.13,15.88) 16.13,13.13 16.66,12.6 24.66,12.6 25.61,11.65 27.06,11.65 v1(27.41,12)
SBG0: length 44
  TOP w0.102: v1(17.72,20.72) 16.83,21.61 11.28,21.61 v1(10.34,20.67) ; v1(10.02,11.94) 9.86,11.79 9.86,9.53 UD1.M2 ; U1.W8 v1(28.06,19.8) ; UD2.M2 v1(9.86,31.59)
  POWER w0.102: v1(9.86,31.59) 9.6,31.33 9.6,26.45 9.99,26.06 9.99,25.19 10.34,24.84 v1(10.34,20.67) 10.34,12.26 v1(10.02,11.94) ; v1(28.06,19.8) 26.99,18.73 25.68,18.73 25.43,18.98 21.64,18.98 19.91,20.72 v1(17.72,20.72)
SCAS: length 44.9
  TOP w0.102: U1.W19 v1(28.71,12) ; UD1.M8 v1(9.86,4.73) ; UD2.M8 9.86,26.79 9.86,26.14 9.99,26 9.99,25.48 10.97,24.5 v1(11.05,24.5) ; v1(15.77,13.51) 13.31,13.51 11.14,15.68 v1(11.05,15.68)
  POWER w0.102: v1(28.71,12) 28.06,11.35 25.4,11.35 24.51,12.24 16.51,12.24 15.77,12.98 v1(15.77,13.51) ; v1(9.86,4.73) 10.62,5.49 10.62,8.24 10.37,8.49 10.37,11.27 11.05,11.94 v1(11.05,15.68) v1(11.05,24.5)
SCKE0: length 47.3
  TOP w0.102: v1(18.36,18.39) 18.58,18.61 19.11,18.61 19.58,19.08 19.58,19.23 19.04,19.77 18.43,19.77 17.82,19.17 17.58,19.17 16.92,19.83 v1(14.7,19.83) ; UD1.K2 11.46,9.53 11.46,10.34 11.94,10.82 12.91,10.82 13.3,11.2 v1(14.56,11.2) ; U1.W14 v1(28.06,15.25) ; UD2.K2 v1(12.26,31.59)
  POWER w0.102: v1(14.56,11.2) 14.7,11.35 v1(14.7,19.83) 14.7,26.06 14.31,26.46 14.31,26.85 12.26,28.89 v1(12.26,31.59) ; v1(28.06,15.25) 27.51,15.8 20.48,15.8 20.13,16.15 20.13,17.97 19.19,18.92 18.46,18.92 18.36,18.82 v1(18.36,18.39)
SCKN: length 41.4
  TOP w0.097: UD1.K8 v1(12.26,4.73) ; UD2.K8 v1(12.26,27.59) ; U1.AB12 26.25,16.88 25.93,17.19 20.77,17.19 20.28,17.68 19.2,17.68 16.16,14.64 13.77,14.64 13.54,14.88 13.54,15.48 DR6.1 13.54,15.72 v1(13.54,16.16)
  POWER w0.097: v1(12.26,4.73) 12.02,4.97 12.02,5.31 12.24,5.53 12.24,7.84 12.71,8.31 12.71,10.93 13.39,11.61 13.39,16.01 v1(13.54,16.16) 13.39,16.31 13.39,25.84 12.02,27.21 12.02,27.35 v1(12.26,27.59)
SCKP: length 41.3
  TOP w0.097: UD2.K7 v1(11.46,27.59) ; v1(12.93,16.16) 12.93,15.72 DR6.2 13.22,15.18 13.22,14.74 13.64,14.32 16.29,14.32 19.33,17.37 20.14,17.37 20.63,16.88 U1.AC12 ; UD1.K7 v1(11.46,4.73)
  POWER w0.097: v1(11.46,4.73) 11.7,4.97 11.7,5.44 11.92,5.66 11.92,7.97 12.39,8.44 12.39,11.06 13.07,11.74 13.07,16.01 v1(12.93,16.16) 13.07,16.31 13.07,25.71 11.7,27.07 11.7,27.35 v1(11.46,27.59)
SCS0: length 48.3
  TOP w0.102: v1(17.93,17.79) 17.93,17.56 17.06,16.69 14.76,16.69 14.24,17.22 v1(12.11,17.22) ; v1(11.06,5.64) UD1.L7 ; v1(11.03,28.7) 11.06,28.66 UD2.L7 ; U1.W13 v1(28.06,16.55)
  POWER w0.102: v1(11.03,28.7) 11.03,27.04 11.76,26.31 11.76,25.87 12.11,25.52 v1(12.11,17.22) 12.11,11.5 11.8,11.18 11.8,10.68 11.68,10.57 11.68,9.49 11.82,9.36 11.82,8.58 11.42,8.18 11.42,7.68 11.06,7.32 v1(11.06,5.64) ; v1(28.06,16.55) 27.67,16.15 24.41,16.15 24.24,16.32 24.24,17.06 24.14,17.16 23.93,17.16 23.63,17.46 23.39,17.46 23.24,17.31 23.24,16.91 23.15,16.83 20.6,16.83 20.5,16.93 20.5,18.11 19.34,19.27 17.48,19.27 17.21,19.01 17.21,18.38 17.81,17.79 v1(17.93,17.79)
SDQ0: length 20.9
  TOP w0.102: UD1.C8 17.46,4.06 17.86,3.66 17.86,2.77 18.05,2.58 19.7,2.58 22.73,5.6 22.73,10.48 23.02,10.77 23.02,10.92 22.73,11.21 22.73,11.68 22.83,11.79 23.18,11.79 23.47,11.5 23.74,11.5 23.91,11.66 23.91,11.81 23.56,12.16 23.56,12.71 23.66,12.81 23.87,12.81 23.99,12.69 23.99,12.38 24.11,12.27 24.27,12.27 24.39,12.38 24.39,12.69 24.51,12.81 25.05,12.81 25.54,13.3 26.11,13.3 U1.AB18
SDQ1: length 20.7
  TOP w0.102: U1.AC17 25.37,13.63 24.9,13.16 TDP2.1 24.36,13.16 24.26,13.06 24.11,13.06 24.01,13.16 23.51,13.16 23.25,12.9 23.1,12.9 22.84,13.16 22.46,13.16 22.3,13 22.3,12.66 22.41,12.56 22.9,12.56 23.02,12.44 23.02,12.28 22.89,12.14 22.47,12.14 22.37,12.04 22.37,11.06 22.47,10.97 22.47,10.72 22.37,10.63 22.37,5.75 TDP13.1 19.62,3 18.76,3 18.66,3.1 18.66,3.71 18.41,3.96 18.11,3.96 17.87,4.2 17.87,4.46 17.57,4.76 17.18,4.76 16.81,5.13 UD1.D7
SDQ2: length 20.9
  TOP w0.102: UD1.B8 18.44,4.33 18.84,3.93 20.05,3.93 22.02,5.9 22.02,11.66 21.83,11.85 21.36,11.85 21.2,12.01 21.2,12.15 21.3,12.26 21.83,12.26 21.95,12.38 21.95,12.54 21.83,12.66 20.65,12.66 20.54,12.76 20.54,12.94 20.67,13.07 21.83,13.07 21.95,13.19 21.95,13.42 22.05,13.52 24.75,13.52 25.19,13.95 26.11,13.95 U1.AB17
SDQ3: length 20.8
  TOP w0.102: UD1.C7 17.65,5.13 18.05,4.73 19.47,4.73 19.59,4.85 19.59,5.43 19.7,5.54 19.87,5.54 20,5.41 20,4.79 20.1,4.69 20.3,4.69 20.72,5.11 20.72,5.25 20.52,5.45 20.52,5.62 20.65,5.75 20.82,5.75 21.09,6.02 21.56,6.02 21.66,6.13 21.66,11.05 19.97,12.73 19.97,12.88 20.97,13.87 24.61,13.87 25.01,14.28 U1.AC16
SDQ4: length 21.7
  TOP w0.102: U1.AB15 26.11,15.25 25.59,15.25 25.55,15.29 24.43,15.29 24.14,15 20.51,15 18.85,13.34 18.85,12.27 20.54,10.58 20.54,7.22 20.33,7.01 18.75,7.01 18.18,6.43 18.18,6.29 18.03,6.14 17.14,6.14 17,6.29 17,7.46 16.66,7.79 UD1.D3
SDQ5: length 20.9
  TOP w0.102: UD1.C3 17.46,8 17.71,7.75 17.71,7.35 17.81,7.25 17.99,7.25 18.46,7.72 19.63,7.72 19.82,7.91 19.82,10.28 19.41,10.7 18.91,10.7 17.93,11.67 17.48,11.67 17.38,11.77 17.38,12 17.56,12.19 18.02,12.19 18.14,12.31 18.14,13.73 20.12,15.71 23.85,15.71 24.04,15.9 26.33,15.9 26.44,15.8 U1.AB14
SDQ6: length 20.8
  TOP w0.102: UD1.C2 17.06,8.73 17.06,7.89 17.35,7.6 17.35,6.68 17.45,6.58 17.82,6.58 18.6,7.36 19.97,7.36 20.18,7.58 20.18,10.43 18.49,12.12 18.49,13.49 20.36,15.35 23.99,15.35 24.22,15.58 25.78,15.58 U1.AC14
